# EAGLE board RGBI2Cv2 (EAGLE 6.2)
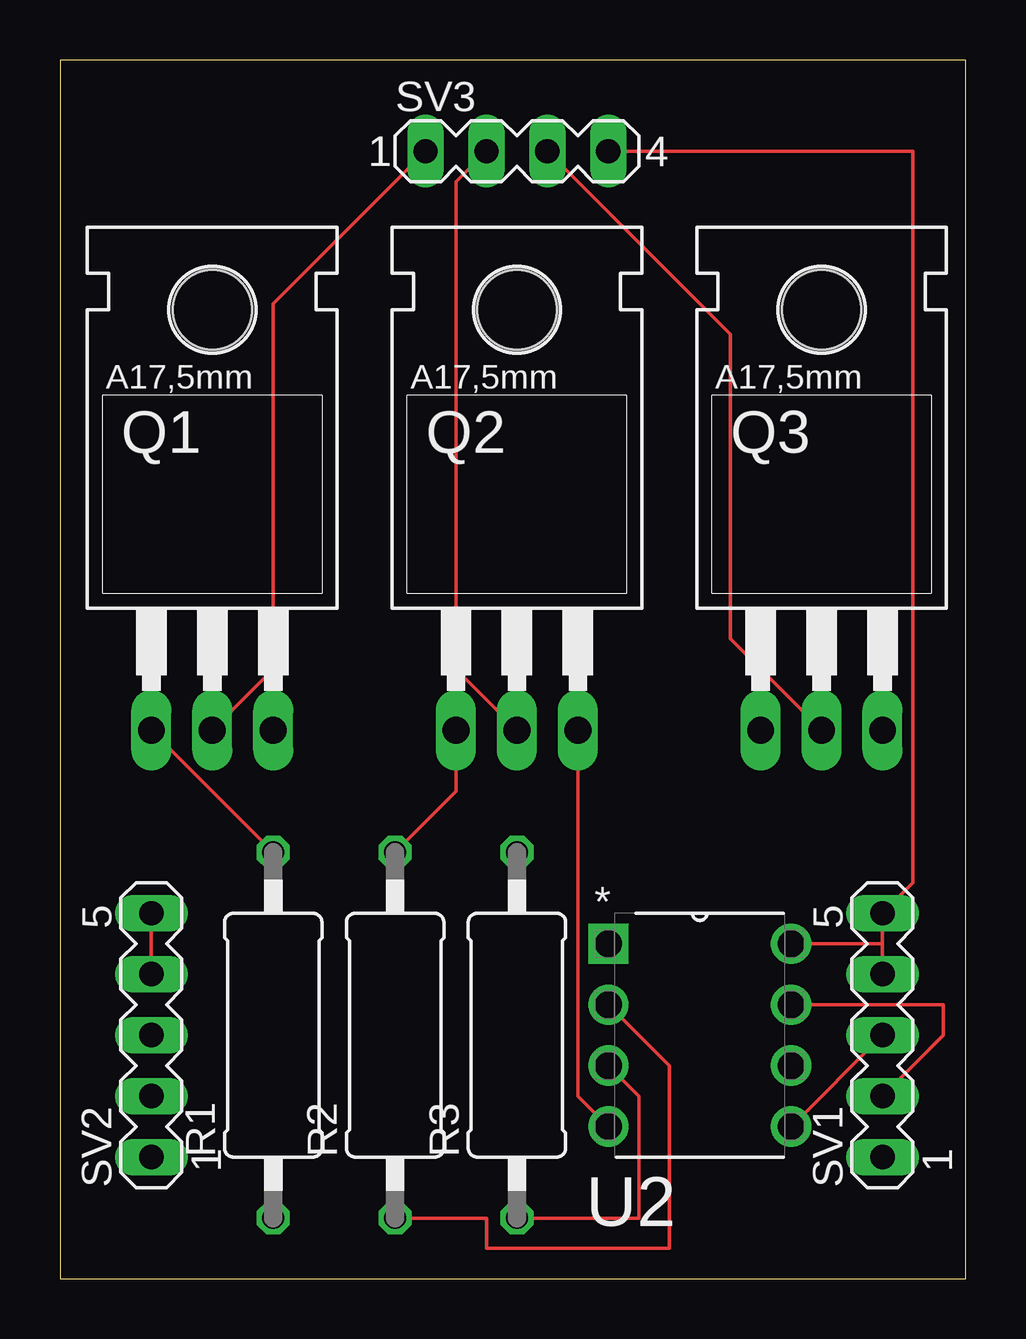
[diagram p0: board, top side]
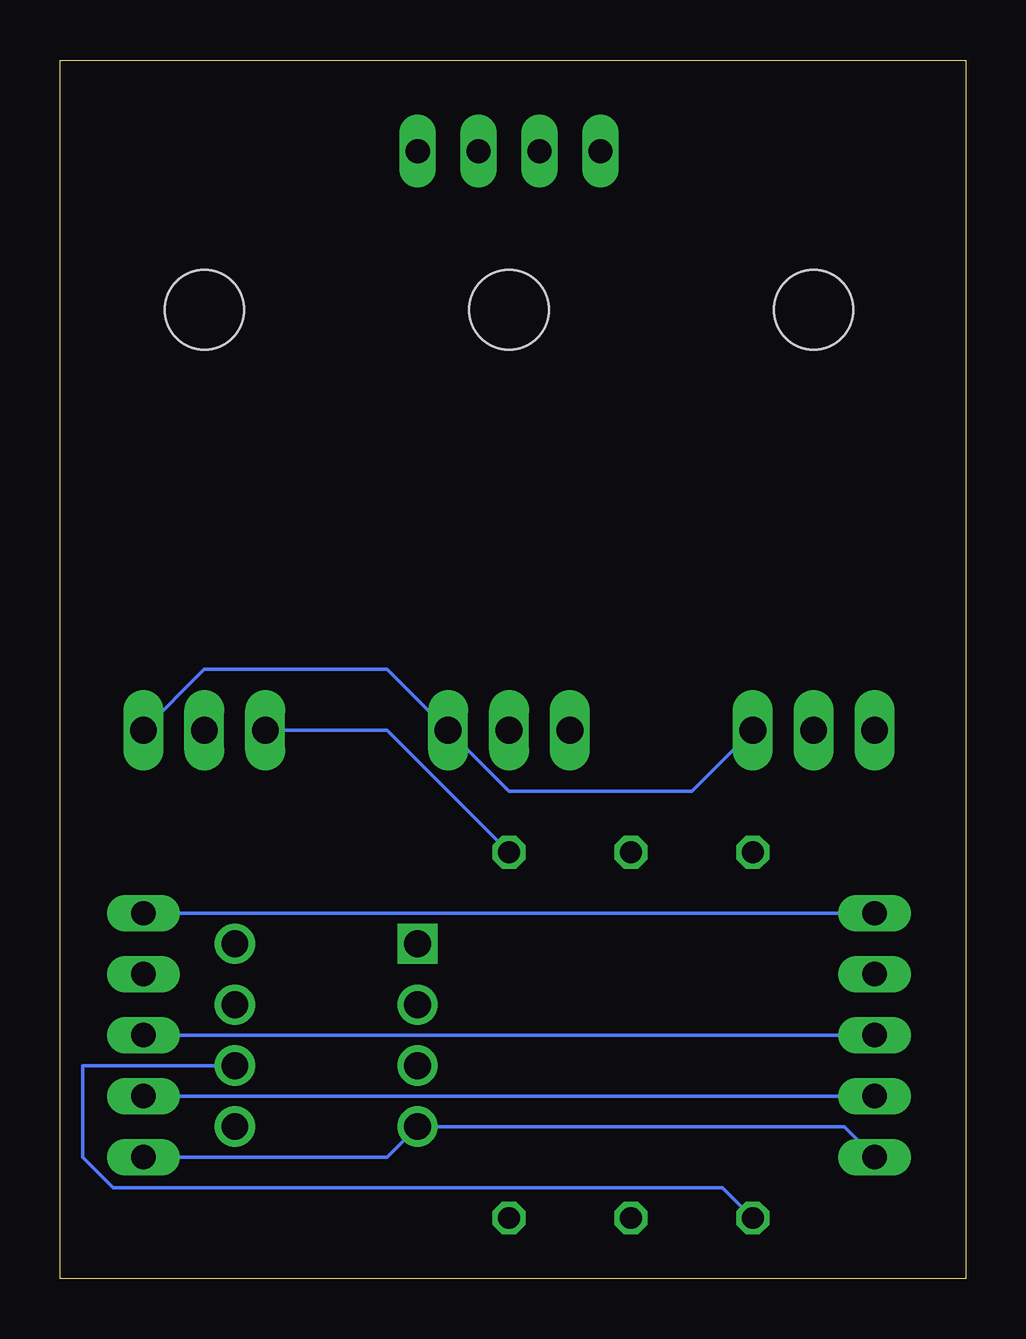
[diagram p1: board, bottom side, seen from below]

Size 37.77 x 50.79 mm. Coordinates in mm from the lower left corner, seen from the top.
Outline: 37.77,50.79 0,50.79 0,0 37.77,0 37.77,50.79
Copper layers (1*16): Top 0.0356mm / dielectric 1.5011mm / Bottom 0.0356mm
Design rules: minimum track width 6mil, minimum drill 13mil, track to track 6mil, track to pad 6mil, pad to pad 6mil, via to via 6mil, smd to smd 6mil, copper to edge 15mil, drill to drill 6mil, minimum pad ring 7mil, minimum via ring 7mil, stop-mask expansion 4mil, vias tented up to drill 0mil, thermal gap 10mil

## Footprints (pad centres in the part's own frame; a part is rotated, then mirrored left to right if it is on the bottom)
TO220BH = drill 1.118 long: D 0,-6.35; G -2.54,-6.35; S 2.54,-6.35 | hole 3.302: 0,11.176
0411/15 = drill 0.914 octagon: 1 -7.62,0; 2 7.62,0
MA05-1 = drill 1.016 long: 1 -5.08,0; 2 -2.54,0; 3 0,0; 4 2.54,0; 5 5.08,0
MA04-1 = drill 1.016 long: 1 -3.81,0; 2 -1.27,0; 3 1.27,0; 4 3.81,0
DIP254P762X533-8 = drill 1.118 square: 1 -7.62,7.62 | drill 1.118: 2 -7.62,5.08; 3 -7.62,2.54; 4 -7.62,0; 5 0,0; 6 0,2.54; 7 0,5.08; 8 0,7.62

## Placement (x,y rotation side)
Q1  STP16NF06  [TO220BH]  6.35,29.21 0 top
Q2  STP16NF06  [TO220BH]  19.05,29.21 0 top
Q3  STP16NF06  [TO220BH]  31.75,29.21 0 top
R1  10K  [0411/15]  8.89,10.16 90 top
R2  10K  [0411/15]  13.97,10.16 90 top
R3  10K  [0411/15]  19.05,10.16 90 top
SV1  [MA05-1]  34.29,10.16 90 top
SV2  [MA05-1]  3.81,10.16 90 top
SV3  [MA04-1]  19.05,46.99 0 top
U2  ATTINY45-20PU  [DIP254P762X533-8]  30.48,6.35 0 top

## Library data of the parts
Q1-Q3 = transistor-power
R1-R3 = resistor
SV1-SV3 = con-lstb; OC_FARNELL: unknown; OC_NEWARK: unknown
U2 = Atmel_By_element14_Batch_1; MPN: ATTINY45-20PU; OC_FARNELL: 1288352; OC_NEWARK: 23M5072; PACKAGE: PDIP-8; SUPPLIER: Atmel

## Nets
GND: Q1.S Q2.S Q3.S SV1.1 SV2.1 U2.4
N$1: Q1.D SV3.1
N$2: Q2.D SV3.2
N$3: SV1.2 SV2.2 U2.7
N$4: SV1.3 SV2.3 U2.5
N$5: R1.1 U2.6
N$6: Q1.G R1.2
N$7: Q2.G R2.2
N$8: Q3.G R3.2
N$9: R2.1 U2.2
N$10: R3.1 U2.3
N$11: Q3.D SV3.3
VCC: SV1.4 SV1.5 SV2.4 SV2.5 SV3.4 U2.8

## Tracks (layer width: path | path; a pad name or v marks a point on that pad's centre or on a via)
GND
  Top 0.152: Q2.S 21.59,7.62 U2.4
  Bottom 0.152: Q1.S 11.43,20.32 19.05,20.32 Q2.S 24.13,25.4 31.75,25.4 Q3.S | SV2.1 5.08,6.35 U2.4 24.13,5.08 SV1.1
N$1
  Top 0.152: SV3.1 8.89,40.64 8.89,25.4 Q1.D
N$2
  Top 0.152: SV3.2 16.51,45.72 16.51,25.4 Q2.D
N$3
  Top 0.152: U2.7 36.83,11.43 36.83,10.16 SV1.2
  Bottom 0.152: SV1.2 SV2.2
N$4
  Top 0.152: SV1.3 U2.5
  Bottom 0.152: SV1.3 SV2.3
N$5
  Bottom 0.152: R1.1 10.16,3.81 35.56,3.81 36.83,5.08 36.83,8.89 U2.6
N$6
  Top 0.152: Q1.G R1.2
N$7
  Top 0.152: R2.2 16.51,20.32 Q2.G
N$8
  Bottom 0.152: R3.2 24.13,22.86 Q3.G
N$9
  Top 0.152: R2.1 17.78,2.54 17.78,1.27 25.4,1.27 25.4,8.89 U2.2
N$10
  Top 0.152: R3.1 24.13,2.54 24.13,7.62 U2.3
N$11
  Top 0.152: SV3.3 27.94,39.37 27.94,26.67 Q3.D
VCC
  Top 0.152: SV2.5 SV2.4 | 34.29,13.97 SV1.5 35.56,16.51 35.56,46.99 SV3.4 | 34.29,13.97 SV1.4 | 34.29,13.97 U2.8
  Bottom 0.152: SV1.5 SV2.5